# Altium PCB CPU.PcbDoc (part 1 of 2)
Units mm, origin at the board's own origin, x right, y up, seen from the top; angles counter-clockwise.
Board outline 103 x 60 mm, 2 copper layers (Top Layer, Bottom Layer), stack 0.904 mm thick; 128 components, 126 nets, 552 pads, 250 vias.
Unrouted connection lines stored in the file: 10.
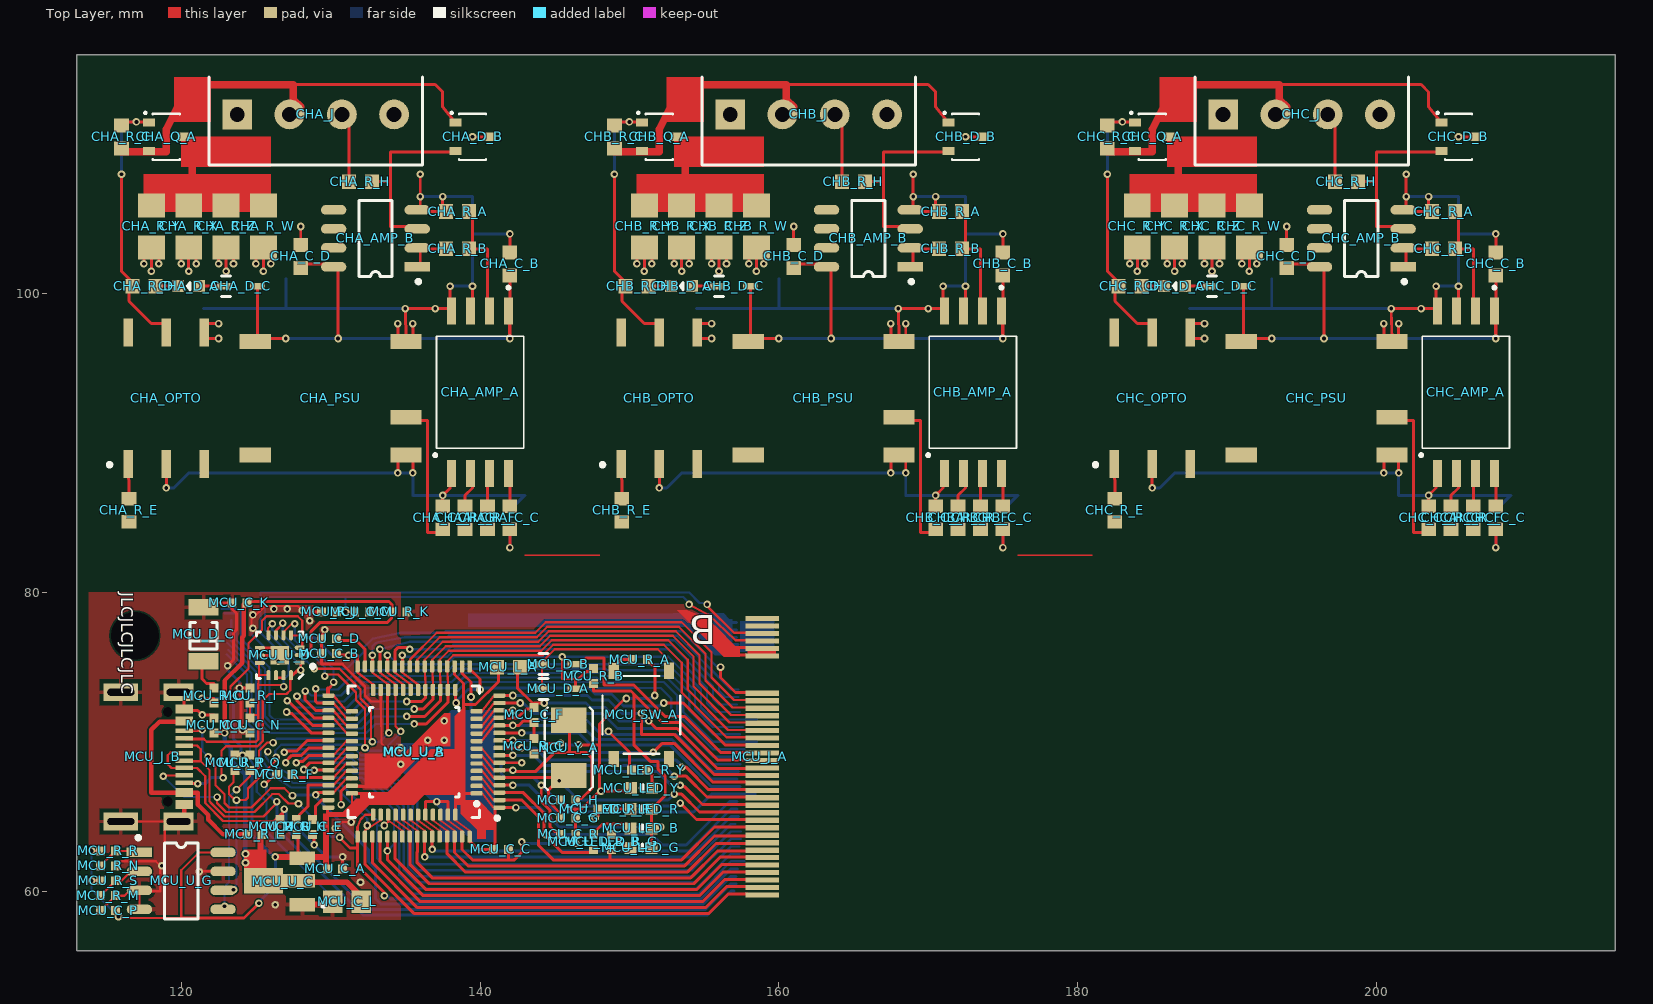
[diagram p0: Top Layer view]
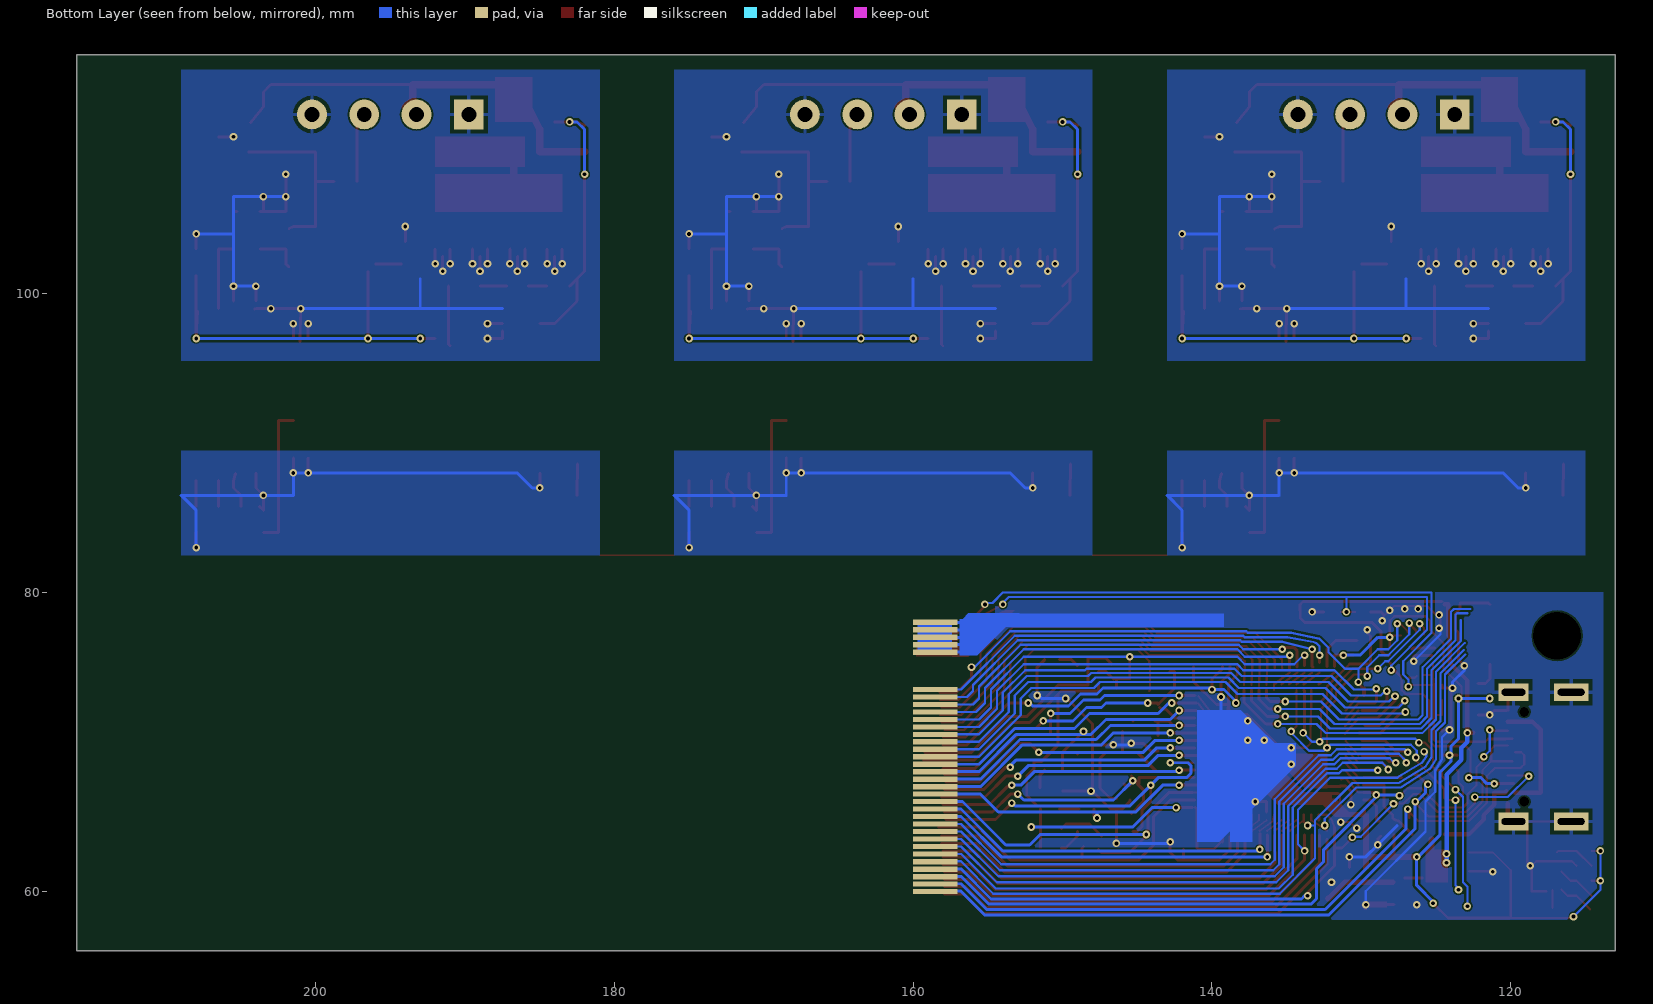
[diagram p1: Bottom Layer view, seen from below]
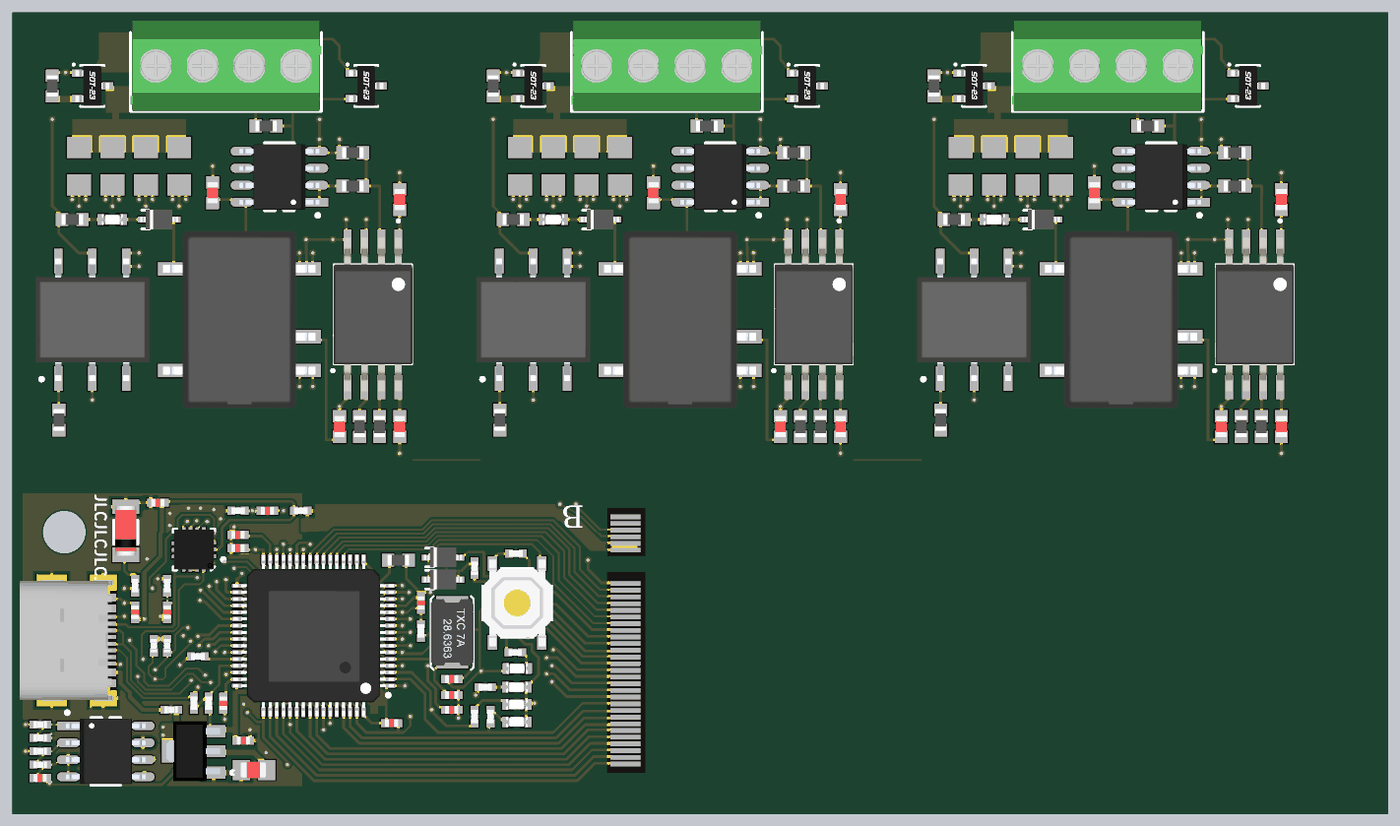
[diagram p3: 3D render of the assembled board from above, using the file's embedded part models]

## Layer stack, top to bottom
Top Solder: solder mask 0.0102, Solder Resist, Dk 3.5
Top Layer: signal copper 0.127
Dielectric 1: core 0.65, FR-4, Dk 4.2
Bottom Layer: signal copper 0.127
Bottom Solder: solder mask 0.0102, Solder Resist, Dk 3.5

## Board outline
113,56 113,80 113,116 216,116 216,56

## Design rules (kind name [scope] priority, off if disabled: settings)
Clearance [All] p1: gap=0.1 ignorepadtopadclearanceinfootprint=FALSE except(0: Arc-Hole Track-Hole SMDPad-Hole THPad-Hole Via-Hole Fill-Hole Poly-Hole Region-Hole Text-Hole; 0.15: Arc-Fill Arc-Poly Arc-Region Track-Fill Track-Poly Track-Region Fill-Fill Fill-Poly Fill-Region Poly-Poly Poly-Region Region-Region)
DiffPairsRouting [All] p1: maxlimit=0.254 minlimit=0.254 mostfreqgap=0.254 toplayer_minwidth=0.381 toplayer_maxwidth=1 toplayer_prefwidth=0.381 bottomlayer_minwidth=0.381 bottomlayer_maxwidth=1 bottomlayer_prefwidth=0.381 maxuncoupledlength=12.7
HoleSize [All] p1: absolutevalues=TRUE maxlimit=4 minlimit=0.025 maxpercent=80.000 minpercent=20.000
MinimumSolderMaskSliver [All] p1: minsoldermaskwidth=0
PolygonConnect [All] p1: thpad.connectstyle=Relief thpad.reliefconductorwidth=0.254 thpad.reliefentries=4 thpad.polygonreliefangle="90 Angle" thpad.airgapwidth=0.254 smdpad.connectstyle=Relief smdpad.reliefconductorwidth=0.254 smdpad.reliefentries=4 smdpad.polygonreliefangle="90 Angle" smdpad.airgapwidth=0.254 via.connectstyle=Direct via.reliefconductorwidth=0.254 via.reliefentries=4 via.polygonreliefangle="90 Angle" via.airgapwidth=0.254
RoutingVias [All] p1: holewidth=0.711 width=1.27 viastyle="Through Hole" minholewidth=0.711 minwidth=1.27 maxholewidth=0.711 maxwidth=1.27
SilkToSolderMaskClearance [IsPad] p1: minsilkscreentomaskgap=0 clearancetoexposedcopper=TRUE
SolderMaskExpansion [All] p1: expansion=0.102
Width [All] p1: maxlimit=1 minlimit=0.15 preferedwidth=0.2 minimp=50.000000 maximp=50.000000 favimp=50.000000
26 further rules are at their usual default settings.

## Classes and differential pairs
component class AFE_C: CHC_AMP_A CHC_AMP_B CHC_C_A CHC_C_B CHC_C_C CHC_C_D CHC_D_A CHC_D_B CHC_D_C CHC_J CHC_OPTO CHC_PSU CHC_Q_A CHC_R_A CHC_R_B CHC_R_C CHC_R_D CHC_R_E CHC_R_F CHC_R_G CHC_R_H CHC_R_W CHC_R_X CHC_R_Y CHC_R_Z
component class AFE_B: CHB_AMP_A CHB_AMP_B CHB_C_A CHB_C_B CHB_C_C CHB_C_D CHB_D_A CHB_D_B CHB_D_C CHB_J CHB_OPTO CHB_PSU CHB_Q_A CHB_R_A CHB_R_B CHB_R_C CHB_R_D CHB_R_E CHB_R_F CHB_R_G CHB_R_H CHB_R_W CHB_R_X CHB_R_Y CHB_R_Z
component class AFE_A: CHA_AMP_A CHA_AMP_B CHA_C_A CHA_C_B CHA_C_C CHA_C_D CHA_D_A CHA_D_B CHA_D_C CHA_J CHA_OPTO CHA_PSU CHA_Q_A CHA_R_A CHA_R_B CHA_R_C CHA_R_D CHA_R_E CHA_R_F CHA_R_G CHA_R_H CHA_R_W CHA_R_X CHA_R_Y CHA_R_Z D3
component class CPU: B C11 CPU_LED_B CPU_LED_B_R CPU_LED_G CPU_LED_G_R CPU_LED_R CPU_LED_R_R CPU_LED_Y CPU_LED_Y_R CPU_R_F D_CPU_A D_CPU_B G MCU_C_A MCU_C_B MCU_C_C MCU_C_D MCU_C_E MCU_C_F MCU_C_G MCU_C_H MCU_C_I MCU_C_K MCU_C_L MCU_C_M MCU_C_N MCU_C_P MCU_C_R MCU_D_A MCU_D_B MCU_D_C MCU_J_A MCU_J_B MCU_L_A MCU_LED_B MCU_LED_G MCU_LED_R MCU_LED_R_B MCU_LED_R_G MCU_LED_R_R MCU_LED_R_Y MCU_LED_Y MCU_R_A MCU_R_B MCU_R_C MCU_R_F MCU_R_G MCU_R_H MCU_R_I MCU_R_J MCU_R_K MCU_R_L MCU_R_M MCU_R_N MCU_R_O MCU_R_P MCU_R_Q MCU_R_R MCU_R_S MCU_SW_A MCU_U_A MCU_U_B MCU_U_C MCU_U_D MCU_U_G MCU_Y_A R R2 R3 R4 U? Ueth_a

## Components (designator, comment, footprint, x,y, rotation, side; value= is the part's Value field where it differs from the comment)
CHA_AMP_A "AMC1200BDWVR" SOIC-8-P1.27-W7.5 140,93.4 r270 top
CHA_AMP_B "LM358" SOIC-8-P1.27-W3.5 133,103.7 r180 top
CHA_C_A "CL10A106MA8NRNC" C_0603 137.5,85 r270 top value=10uF
CHA_C_B "CL10A106MA8NRNC" C_0603 142,102 r90 top value=10uF
CHA_C_C "CL10A106MA8NRNC" C_0603 142,85 r90 top value=10uF
CHA_C_D "CL10A106MA8NRNC" C_0603 128,102.5 r90 top value=10uF
CHA_D_A "KT-0603R" D_0603 120.5,100.5 r0 top
CHA_D_B "PSM712-LF-T7" TO-236AB 139.5,110.5 r0 top
CHA_D_C "1N4148WS" SOD-323 124,100.5 r0 top
CHA_J "XY350V-3.5-4P" XY350V-3.5-4P 129,112 r0 top
CHA_OPTO "4N35SM" SOT254P916X508-6N 119,93 r90 top
CHA_PSU "B0505XT-1WR3" CONV_B0512XT-1WR3 130,93 r180 top
CHA_Q_A "AO3400A" TO-236AB 119,110.5 r0 top
CHA_R_A "0603WAF1001T5E" R_0603 138.5,105.5 r0 top value=1k
CHA_R_B "0603WAF2202T5E" R_0603 138.5,103 r180 top value=22k
CHA_R_C "0603WAF2202T5E" R_0603 116,110.5 r270 top value=22k
CHA_R_D "0603WAF1001T5E" R_0603 117.5,100.5 r0 top value=1k
CHA_R_E "0603WAF1001T5E" R_0603 116.5,85.5 r90 top value=1k
CHA_R_F "0603WAF0000T5E" R_0603 140.5,85 r90 top value=0R
CHA_R_G "0603WAF0000T5E" R_0603 139,85 r90 top value=0R
CHA_R_H "0603WAF0000T5E" R_0603 132,107.5 r180 top value=0R
CHA_R_W "1206W4F1000T5E" R_1206 125.5,104.5 r90 top value=100R
CHA_R_X "1206W4F1000T5E" R_1206 120.5,104.5 r90 top value=100R
CHA_R_Y "1206W4F1000T5E" R_1206 118,104.5 r90 top value=100R
CHA_R_Z "1206W4F1000T5E" R_1206 123,104.5 r90 top value=100R
CHB_AMP_A "AMC1200BDWVR" SOIC-8-P1.27-W7.5 173,93.4 r270 top
CHB_AMP_B "LM358" SOIC-8-P1.27-W3.5 166,103.7 r180 top
CHB_C_A "CL10A106MA8NRNC" C_0603 170.5,85 r270 top value=10uF
CHB_C_B "CL10A106MA8NRNC" C_0603 175,102 r90 top value=10uF
CHB_C_C "CL10A106MA8NRNC" C_0603 175,85 r90 top value=10uF
CHB_C_D "CL10A106MA8NRNC" C_0603 161,102.5 r90 top value=10uF
CHB_D_A "KT-0603R" D_0603 153.5,100.5 r0 top
CHB_D_B "PSM712-LF-T7" TO-236AB 172.5,110.5 r0 top
CHB_D_C "1N4148WS" SOD-323 157,100.5 r0 top
CHB_J "XY350V-3.5-4P" XY350V-3.5-4P 162,112 r0 top
CHB_OPTO "4N35SM" SOT254P916X508-6N 152,93 r90 top
CHB_PSU "B0505XT-1WR3" CONV_B0512XT-1WR3 163,93 r180 top
CHB_Q_A "AO3400A" TO-236AB 152,110.5 r0 top
CHB_R_A "0603WAF1001T5E" R_0603 171.5,105.5 r0 top value=1k
CHB_R_B "0603WAF2202T5E" R_0603 171.5,103 r180 top value=22k
CHB_R_C "0603WAF2202T5E" R_0603 149,110.5 r270 top value=22k
CHB_R_D "0603WAF1001T5E" R_0603 150.5,100.5 r0 top value=1k
CHB_R_E "0603WAF1001T5E" R_0603 149.5,85.5 r90 top value=1k
CHB_R_F "0603WAF0000T5E" R_0603 173.5,85 r90 top value=0R
CHB_R_G "0603WAF0000T5E" R_0603 172,85 r90 top value=0R
CHB_R_H "0603WAF0000T5E" R_0603 165,107.5 r180 top value=0R
CHB_R_W "1206W4F1000T5E" R_1206 158.5,104.5 r90 top value=100R
CHB_R_X "1206W4F1000T5E" R_1206 153.5,104.5 r90 top value=100R
CHB_R_Y "1206W4F1000T5E" R_1206 151,104.5 r90 top value=100R
CHB_R_Z "1206W4F1000T5E" R_1206 156,104.5 r90 top value=100R
CHC_AMP_A "AMC1200BDWVR" SOIC-8-P1.27-W7.5 206,93.4 r270 top
CHC_AMP_B "LM358" SOIC-8-P1.27-W3.5 199,103.7 r180 top
CHC_C_A "CL10A106MA8NRNC" C_0603 203.5,85 r270 top value=10uF
CHC_C_B "CL10A106MA8NRNC" C_0603 208,102 r90 top value=10uF
CHC_C_C "CL10A106MA8NRNC" C_0603 208,85 r90 top value=10uF
CHC_C_D "CL10A106MA8NRNC" C_0603 194,102.5 r90 top value=10uF
CHC_D_A "KT-0603R" D_0603 186.5,100.5 r0 top
CHC_D_B "PSM712-LF-T7" TO-236AB 205.5,110.5 r0 top
CHC_D_C "1N4148WS" SOD-323 190,100.5 r0 top
CHC_J "XY350V-3.5-4P" XY350V-3.5-4P 195,112 r0 top
CHC_OPTO "4N35SM" SOT254P916X508-6N 185,93 r90 top
CHC_PSU "B0505XT-1WR3" CONV_B0512XT-1WR3 196,93 r180 top
CHC_Q_A "AO3400A" TO-236AB 185,110.5 r0 top
CHC_R_A "0603WAF1001T5E" R_0603 204.5,105.5 r0 top value=1k
CHC_R_B "0603WAF2202T5E" R_0603 204.5,103 r180 top value=22k
CHC_R_C "0603WAF2202T5E" R_0603 182,110.5 r270 top value=22k
CHC_R_D "0603WAF1001T5E" R_0603 183.5,100.5 r0 top value=1k
CHC_R_E "0603WAF1001T5E" R_0603 182.5,85.5 r90 top value=1k
CHC_R_F "0603WAF0000T5E" R_0603 206.5,85 r90 top value=0R
CHC_R_G "0603WAF0000T5E" R_0603 205,85 r90 top value=0R
CHC_R_H "0603WAF0000T5E" R_0603 198,107.5 r180 top value=0R
CHC_R_W "1206W4F1000T5E" R_1206 191.5,104.5 r90 top value=100R
CHC_R_X "1206W4F1000T5E" R_1206 186.5,104.5 r90 top value=100R
CHC_R_Y "1206W4F1000T5E" R_1206 184,104.5 r90 top value=100R
CHC_R_Z "1206W4F1000T5E" R_1206 189,104.5 r90 top value=100R
MCU_C_A "CL05A106MQ5NUNC" C_0402 130.3,61.5 r0 top value=10uF
MCU_C_B "CL05A106MQ5NUNC" C_0402 129.9,75.9 r180 top value=10uF
MCU_C_C "CL05A106MQ5NUNC" C_0402 141.4,62.8 r0 top value=10uF
MCU_C_D "CL05A106MQ5NUNC" C_0402 129.9,76.9 r180 top value=10uF
MCU_C_E "CL05A106MQ5NUNC" C_0402 128.8,64.3 r270 top value=10uF
MCU_C_F "CL05A105KA5NQNC" C_0402 143.6,71.8 r90 top value=1uF
MCU_C_G "0402CG120J500NT" C_0402 145.9,64.9 r180 top value=12pF
MCU_C_H "0402CG120J500NT" C_0402 145.9,66.1 r0 top value=12pF
MCU_C_I "CL05A106MQ5NUNC" C_0402 122.2,71.1 r90 top value=10uF
MCU_C_K "CL05A106MQ5NUNC" C_0402 123.9,79.3 r180 top value=10uF
MCU_C_L "CL21A106KAYNNNE" C_0805 131.1,59.3 r0 top value=10uF
MCU_C_M "CL05B104KO5NNNC" C_0402 132.1,78.7 r0 top value=100nF
MCU_C_N "CL05B104KO5NNNC" C_0402 124.6,71.1 r270 top value=100nF
MCU_C_P "CL05A106MQ5NUNC" C_0402 115.1,58.7 r0 top value=10uF
MCU_C_R "0402CG101J500NT" C_0402 145.9,63.8 r180 top value=100pF
MCU_D_A "1N4148WS" SOD-323 145.25,73.55 r0 top
MCU_D_B "1N4148WS" SOD-323 145.25,75.2 r0 top
MCU_D_C "ZMM3V3-M" DO-213AA 121.5,77.2 r90 top
MCU_J_A "NGFF_MALE_B" NGFF_MALE_B 156.275,69 r90 top
MCU_J_B "918-418K2023S40001" 918-418K2023S40001 116.9,69 r270 top
MCU_L_A "SDFL1608S100KTF" L_0603 141.9,75 r180 top value=10uH
MCU_LED_B "19-217/BHC-ZL1M2RY/3T" D_0603 150.77,64.2 r0 top
MCU_LED_G "19-217/GHC-YR1S2/3T" D_0603 150.77,62.9 r0 top
MCU_LED_R "KT-0603R" D_0603 150.77,65.5 r0 top
MCU_LED_R_B "0402WGF2200TCE" R_0402 147.6,63.3 r90 top value=220R
MCU_LED_R_G "0402WGF3300TCE" R_0402 148.8,63.3 r90 top value=330R
MCU_LED_R_R "0402WGF3300TCE" R_0402 148.4,65.5 r0 top value=330R
MCU_LED_R_Y "0402WGF3300TCE" R_0402 150.65,68.1 r0 top value=330R
MCU_LED_Y "19-21UYC/S530-A4/TR8" D_0603 150.8,66.9 r0 top
MCU_R_A "0402WGF3300TCE" R_0402 150.7,75.5 r0 top value=330R
MCU_R_B "0402WGF4701TCE" R_0402 147.6,74.4 r90 top value=4.7k
MCU_R_C "0402WGF0000TCE" R_0402 143.6,69.7 r90 top value=0R
MCU_R_F "0402WGF220JTCE" R_0402 126.9,67.8 r0 top value=22R
MCU_R_G "0402WGF220JTCE" R_0402 126.6,64.3 r270 top value=22R
MCU_R_H "0402WGF1501TCE" R_0402 127.7,64.3 r270 top value=1.5k
MCU_R_I "0402WGF5101TCE" R_0402 124.6,73.1 r90 top value=5.1k
MCU_R_J "0402WGF5101TCE" R_0402 129.9,78.7 r180 top value=5.1k
MCU_R_K "0402WGF0000TCE" R_0402 134.6,78.7 r180 top value=0R
MCU_R_L "0402WGF0000TCE" R_0402 124.9,63.8 r180 top value=0R
MCU_R_M "0402WGF0000TCE" R_0402 115.1,59.7 r0 top value=0R
MCU_R_N "0402WGF0000TCE" R_0402 115.1,61.7 r0 top value=0R
MCU_R_O "0402WGF0000TCE" R_0402 122.2,73.1 r270 top value=0R
MCU_R_P "0402WGF5101TCE" R_0402 123.6,68.6 r90 top value=5.1k
MCU_R_Q "0402WGF5101TCE" R_0402 124.6,68.6 r90 top value=5.1k
MCU_R_R "0402WGF1002TCE" R_0402 115.1,62.7 r180 top value=10k
MCU_R_S "0402WGF1002TCE" R_0402 115.1,60.7 r180 top value=10k
MCU_SW_A "TS-1187A-B-A-B" TS-1187A-C-C-B 150.8,71.8 r90 top
MCU_U_A "STM32F405RGT6" QFP-64-P0.5MM 135.55,69.35 r180 top
MCU_U_B "GD32F103CBT6" QFP-48-P0.5MM 135.6,69.3 r180 top
MCU_U_C "HT7533-1" SOT-223-3 126.3,60.7 r180 top
MCU_U_D "FUSB302BMPX" QFN-14-P0.5MM 126.6,75.8 r180 top
MCU_U_G "24LC256T-I/SN" SOIC-8-P1.27-W3.5 120,60.7 r0 top
MCU_Y_A "X50328MSB2GI" YSX530GA 145.94,69.6 r90 top value=8MHz

## Footprints (in the part's own frame and the unit in brackets; to place one, negate y for a bottom-side part, rotate by r counter-clockwise, add the part's x,y. Pads: shape width x height; smd on the part's side, far side on the other; paste and mask are expansions set on the pad)
918-418K2023S40001 [mm] "USB-C (USB TYPE-C) USB 2.0 Receptacle Connector 24 (16+8 Dummy) Position Surface Mount, Right Angle"
  rect 1.2x2 hole 0.45 slot 1.6 at 90 deg: 0(-4.32,2.917) 0(4.33,2.917)
  rect 1.2x2.3 hole 0.45 slot 1.8 at 90 deg: 0(-4.32,-0.943) 0(4.33,-0.943)
  rect 0.6x1.15 smd: A1_B12(-3.2,3.3) A4_B9(-2.4,3.297) A9_B4(2.4,3.3) A12_B1(3.2,3.3)
  rect 0.3x1.15 smd: A5(-1.25,3.297) A6(-0.25,3.297) A7(0.25,3.3) A8(1.25,3.297) B5(1.75,3.297) B6(0.75,3.297) B7(-0.75,3.297) B8(-1.75,3.297)
  round 0 hole 0.65 unplated: M(-3,2.2) M(3,2.2)
  body extent -4.47,-3.35 4.47,3.55, height 3.18
C_0402 [mm] "Chip Capacitor; Body 1.0 x 0.5 mm (LxW typ)"
  rect 0.6x0.6 smd: 1(-0.508,0) 2(0.508,0)
  body extent -0.5,-0.3 0.5,0.3, height 0.2
C_0603 [mm] "Chip Capacitor; Body 1.6 x 0.8 mm (LxW typ)"
  rect 0.93x0.98 smd: 1(-0.77,0) 2(0.77,0)
  body extent -0.8,-0.4 0.8,0.4, height 0.3
C_0805 [mm] "Chip Capacitor; Body 2.0 x 1.2 mm (LxW typ)"
  rect 1.3x1.5 smd: 1(-0.95,0) 2(0.95,0)
  body extent -1.05,-0.62 0.95,0.62, height 0.78
CONV_B0512XT-1WR3 [mm]
  rect 2.1x1 smd: 1(-5.05,3.81) 2(-5.05,1.27) 4(-5.05,-3.81) 5(5.05,-3.81) 8(5.05,3.81)
  silkscreen extent -7.1,3.71 -6.9,3.91, body extent -5.7,-6.6 5.7,6.6, height 7.25
D_0603 [mm] "Chip Diode; Body 1.6 x 0.8 mm (LxW typ)"
  rect 0.8x0.8 smd: 1(-0.7,0) 2(0.7,0)
  silkscreen extent -0.1,-0.25 0.1,0.25, body extent -0.8,-0.4 0.8,0.4, height 0.35
DO-213AA [mm] "2 Leads"
  rect 1.1x2 smd: 1(-1.8,0) 2(1.8,0)
  silkscreen extent -1,-0.9 0.8,0.9, body extent -1.85,-0.8 1.85,0.8, height 1.61
L_0603 [mm]
  rect 0.93x0.98 smd: 1(-0.77,0) 2(0.77,0)
  body extent -0.82,-0.41 0.83,0.41, height 0.46
NGFF_MALE_B [mm] "NGFF B Key, Male"
  rect 0.35x2.25 smd: 1(9.25,-2.625) 3(8.75,-2.625) 5(8.25,-2.625) 7(7.75,-2.625) 9(7.25,-2.625) 11(6.75,-2.625) 21(4.25,-2.625) 23(3.75,-2.625) 25(3.25,-2.625) 27(2.75,-2.625) 29(2.25,-2.625) 31(1.75,-2.625) 33(1.25,-2.625) 35(0.75,-2.625) 37(0.25,-2.625) 39(-0.25,-2.625) 41(-0.75,-2.625) 43(-1.25,-2.625) 45(-1.75,-2.625) 47(-2.25,-2.625) 49(-2.75,-2.625) 51(-3.25,-2.625) 53(-3.75,-2.625) 55(-4.25,-2.625) 57(-4.75,-2.625) 59(-5.25,-2.625) 61(-5.75,-2.625) 63(-6.25,-2.625) 65(-6.75,-2.625) 67(-7.25,-2.625) 69(-7.75,-2.625) 71(-8.25,-2.625) 73(-8.75,-2.625) 75(-9.25,-2.625)
  rect 0.35x3 smd far side: 2(9,-2.25) 4(8.5,-2.25) 6(8,-2.25) 8(7.5,-2.25) 10(7,-2.25) 20(4.5,-2.25) 22(4,-2.25) 24(3.5,-2.25) 26(3,-2.25) 28(2.5,-2.25) 30(2,-2.25) 32(1.5,-2.25) 34(1,-2.25) 36(0.5,-2.25) 38(0,-2.25) 40(-0.5,-2.25) 42(-1,-2.25) 44(-1.5,-2.25) 46(-2,-2.25) 48(-2.5,-2.25) 50(-3,-2.25) 52(-3.5,-2.25) 54(-4,-2.25) 56(-4.5,-2.25) 58(-5,-2.25) 60(-5.5,-2.25) 62(-6,-2.25) 64(-6.5,-2.25) 66(-7.025,-2.25) 68(-7.525,-2.25) 70(-8.025,-2.25) 72(-8.525,-2.25) 74(-9.025,-2.25)
QFN-14-P0.5MM [mm] "Quad Flat No Lead, Plastic; 14 Terminals; Body 2.5 x 2.5 mm; Pitch 0.5 mm"
  rect 1.25x1.25 smd: 0(0,0)
  rect 0.28x0.28 smd: 1(-1.515,0.496) 2(-1.515,-0.004) 3(-1.515,-0.504) 4(-0.75,-1.515) 5(-0.25,-1.515) 6(0.25,-1.515) 7(0.75,-1.515) 8(1.515,-0.479) 9(1.515,0.021) 10(1.515,0.521) 11(0.75,1.515) 12(0.25,1.515) 13(-0.25,1.515) 14(-0.75,1.515)
  oval 0.66x0.28 smd: 1(-1.325,0.496) 2(-1.325,-0.004) 3(-1.325,-0.504) 8(1.325,-0.479) 9(1.325,0.021) 10(1.325,0.521)
  oval 0.28x0.66 smd: 4(-0.75,-1.325) 5(-0.25,-1.325) 6(0.25,-1.325) 7(0.75,-1.325) 11(0.75,1.325) 12(0.25,1.325) 13(-0.25,1.325) 14(-0.75,1.325)
  silkscreen extent -2.33,-1.55 1.55,1.55, body extent -1.5,-1.5 1.5,1.5, height 0.81
QFP-48-P0.5MM [mm] "QFP; 48 Leads; Body 7 x 7 mm; Pitch 0.5 mm"
  rrect50% 0.8x0.3 smd: 1(-4.175,2.75) 2(-4.175,2.25) 3(-4.175,1.75) 4(-4.175,1.25) 5(-4.175,0.75) 6(-4.175,0.25) 7(-4.175,-0.25) 8(-4.175,-0.75) 9(-4.175,-1.25) 10(-4.175,-1.75) 11(-4.175,-2.25) 12(-4.175,-2.75) 25(4.175,-2.75) 26(4.175,-2.25) 27(4.175,-1.75) 28(4.175,-1.25) 29(4.175,-0.75) 30(4.175,-0.25) 31(4.175,0.25) 32(4.175,0.75) 33(4.175,1.25) 34(4.175,1.75) 35(4.175,2.25) 36(4.175,2.75)
  rrect50% 0.3x0.8 smd: 13(-2.75,-4.175) 14(-2.25,-4.175) 15(-1.75,-4.175) 16(-1.25,-4.175) 17(-0.75,-4.175) 18(-0.25,-4.175) 19(0.25,-4.175) 20(0.75,-4.175) 21(1.25,-4.175) 22(1.75,-4.175) 23(2.25,-4.175) 24(2.75,-4.175) 37(2.75,4.175) 38(2.25,4.175) 39(1.75,4.175) 40(1.25,4.175) 41(0.75,4.175) 42(0.25,4.175) 43(-0.25,4.175) 44(-0.75,4.175) 45(-1.25,4.175) 46(-1.75,4.175) 47(-2.25,4.175) 48(-2.75,4.175)
  silkscreen extent -4.3,-3 3,3.57, body extent -4.5,-4.5 4.5,4.5, height 1.6
QFP-64-P0.5MM [mm] "64-Pin Plastic Quad Flat Pack (TQFP)"
  rrect50% 0.8x0.3 smd: 1(-5.742,3.75) 2(-5.742,3.25) 3(-5.742,2.75) 4(-5.742,2.25) 5(-5.742,1.75) 6(-5.742,1.25) 7(-5.742,0.75) 8(-5.742,0.25) 9(-5.742,-0.25) 10(-5.742,-0.75) 11(-5.742,-1.25) 12(-5.742,-1.75) 13(-5.742,-2.25) 14(-5.742,-2.75) 15(-5.742,-3.25) 16(-5.742,-3.75) 33(5.7,-3.75) 34(5.7,-3.25) 35(5.7,-2.75) 36(5.7,-2.25) 37(5.7,-1.75) 38(5.7,-1.25) 39(5.7,-0.75) 40(5.7,-0.25) 41(5.7,0.25) 42(5.7,0.75) 43(5.7,1.25) 44(5.7,1.75) 45(5.7,2.25) 46(5.7,2.75) 47(5.7,3.25) 48(5.7,3.75)
  rrect50% 0.3x0.8 smd: 17(-3.75,-5.7) 18(-3.25,-5.7) 19(-2.75,-5.7) 20(-2.25,-5.7) 21(-1.75,-5.7) 22(-1.25,-5.7) 23(-0.75,-5.7) 24(-0.25,-5.7) 25(0.25,-5.7) 26(0.75,-5.7) 27(1.25,-5.7) 28(1.75,-5.7) 29(2.25,-5.7) 30(2.75,-5.7) 31(3.25,-5.7) 32(3.75,-5.7) 49(3.75,5.7) 50(3.25,5.7) 51(2.75,5.7) 52(2.25,5.7) 53(1.75,5.7) 54(1.25,5.7) 55(0.75,5.7) 56(0.25,5.7) 57(-0.25,5.7) 58(-0.75,5.7) 59(-1.25,5.7) 60(-1.75,5.7) 61(-2.25,5.7) 62(-2.75,5.7) 63(-3.25,5.7) 64(-3.75,5.7)
  silkscreen extent -5.72,-4.4 4.4,4.57, body extent -6.01,-6.01 6.01,6.01, height 1.55
R_0402 [mm] "Body 1.0 x 0.5 mm (LxW typ)"
  rect 0.6x0.6 smd: 1(-0.508,0) 2(0.508,0)
  body extent -0.5,-0.25 0.5,0.25, height 0.35
R_0603 [mm] "Body 1.6 x 0.8 mm (LxW typ)"
  rect 0.93x0.98 smd: 1(-0.77,0) 2(0.77,0)
  body extent -0.82,-0.41 0.83,0.41, height 0.46
R_1206 [mm] "Body 3.2 x 1.6 mm (LxW typ)"
  rect 1.6x1.8 smd: 1(-1.4,0) 2(1.4,0)
  body extent -1.91,-0.76 1.91,0.76, height 1
SOD-323 [mm] "SOD-323/SC-76; 2 Leads; Body 1.7 x 1.3 mm, (LxW)"
  rect 1x0.45 smd: 1(-1.1,0) 2(1.1,0)
  silkscreen extent -1.3,-0.7 -0.7,0.7, body extent -1.43,-0.74 1.43,0.76, height 1.12
SOIC-8-P1.27-W3.5 [mm]
  rect 1.7x0.65 smd: 1(-2.8,1.9)
  oval 1.7x0.65 smd: 2(-2.8,0.63) 3(-2.8,-0.64) 4(-2.8,-1.91) 5(2.8,-1.91) 6(2.8,-0.64) 7(2.8,0.63) 8(2.8,1.9)
  silkscreen extent -3,-2.55 1.12,3.01, body extent -3,-2.45 3,2.45, height 1.5
SOIC-8-P1.27-W7.5 [mm]
  rect 1.8x0.6 smd mask+0.07: 1(-5.45,1.905) 2(-5.45,0.635) 3(-5.45,-0.635) 4(-5.45,-1.905) 5(5.45,-1.905) 6(5.45,-0.635) 7(5.45,0.635) 8(5.45,1.905)
  silkscreen extent -7.1,-2.93 3.75,2.93, body extent -5.75,-2.95 5.75,2.95, height 2.8
SOT254P916X508-6N [mm]
  rect 1.85x0.65 smd: 1(-4.4,2.54) 2(-4.4,0) 3(-4.4,-2.54) 4(4.4,-2.54) 5(4.4,0) 6(4.4,2.54)
  silkscreen extent -4.55,3.7 -4.35,3.9, body extent -4.58,-4.25 4.58,4.26, height 5.08
SOT-223-3 [mm] "SOT223, 4-Leads, Body IPC High Density"
  rect 1.7x0.9 smd: 1(-1.8,1.6) 3(-1.8,-1.5)
  rect 2.5x0.9 smd: 2(-1.4,0)
  rect 2.6x1.7 smd: 2(0.8,0)
  silkscreen extent -3.33,1.48 -3.08,1.72, body extent -2.25,-2.25 1.75,2.25, height 1.5
TO-236AB [mm] "SOT-23-3 Leads; Body 3.1 x 3 mm, inc. leads (LxW max)"
  rect 0.8x0.55 smd: 1(-1.15,0.95) 2(-1.15,-0.95) 3(1.15,0)
  silkscreen extent -1.45,-1.55 0.9,1.65, body extent -1.28,-1.5 1.27,1.5, height 1
TS-1187A-C-C-B [mm] "Tactile Switch SPST-NO Top Actuated Surface Mount"
  rect 1.1x0.7 smd: 1(-2.95,1.85) 1(2.95,1.85) 2(-2.95,-1.85) 2(2.95,-1.85)
  silkscreen extent -2.6,-2.6 2.6,2.6, body extent -3.25,-2.54 3.25,2.54, height 1.52
XY350V-3.5-4P [mm] "4 Terminal 3.5mm Header"
  rect 2x2 hole 1: 1(-5.25,0)
  round 2 hole 1: 2(-1.75,0) 3(1.75,0) 4(5.25,0)
  silkscreen extent -7.15,-3.4 7.15,2.5, body extent -7.15,-3.4 7.15,3.4, height 8.4
YSX530GA [mm]
  rect 1.7x2.4 smd: 1(-1.85,0) 2(1.85,0)
  silkscreen extent -2.8,-1.6 2.7,1.6, body extent -2.5,-1.6 2.5,1.6, height 1.2

## Part data
CHA_AMP_A CHB_AMP_A CHC_AMP_A: "U - IC - 100KHz ISOLATION AMPLIFIER", JLC Availability=Extended, LCSC Part #=C79905, Speed=100KHz
CHA_AMP_B CHB_AMP_B CHC_AMP_B: library part LMV358IDR, "U - IC - OP AMP (DUAL)", JLC Availability=Extended, LCSC Part #=C63813, Speed=0.4V/us
CHA_C_A CHA_C_B CHA_C_C CHA_C_D CHB_C_A CHB_C_B CHB_C_C CHB_C_D CHC_C_A CHC_C_B CHC_C_C CHC_C_D: "C - CAPACITOR - MLCC - 10uF - 25V - 0603", LCSC Part #=C96446, Availability=Basic, WVDC=25
CHA_D_A CHB_D_A CHC_D_A MCU_LED_R: "D - LED - 0603 - Red", JLC Availability=Basic, LCSC Part #=C2286
CHA_D_B CHB_D_B CHC_D_B: "D - DIODE - TVS x2 - 7.2V", JLC Availability=Basic, LCSC Part #=C32677, If=1A, Vrrm=7
CHA_D_C CHB_D_C CHC_D_C MCU_D_A MCU_D_B: "D - DIODE - FAST TRR - 100V - 150mA - 4ns", JLC Availability=Basic, LCSC Part #=C2128, If=150mA, PIV=100V, Trr=4ns
CHA_J CHB_J CHC_J: "J - JACK - TERMINAL - 4P - RIGHT - MALE", JLC Availability=Extended, LCSC Part #=C557656
CHA_OPTO CHB_OPTO CHC_OPTO: "Q - OPTOCOUPLER - 4170 V - 100% CTR", LCSC Part #=C258228, Manufacturer_Name=onsemi, Package=SOT254P916X508-6N, DeviceSetName=4N35SM, GateName_1=G$1, Height=5.08mm, LibraryName=4N35SM, Manufacturer_Part_Number=4N35SM, Mouser_Price-Stock=https://www.mouser.co.uk/ProductDetail/onsemi-Fairchild/4N35SM?qs=VZOZQ19d7%2FIRbTYJunTCyQ%3D%3D, SymbolName_1=4N35SM
CHA_PSU CHB_PSU CHC_PSU: "T - Isolated Module DC DC Converter 5 -> 5V 200mA - DIP", LCSC Part #=C19188495, Check_prices=https://www.snapeda.com/parts/B0512XT-1WR3/MORNSUN/view-part/?ref=eda, MF=EVISUN, MP=B0505XT-1WR3, SnapEDA_Link=https://www.snapeda.com/parts/B0512XT-1WR3/MORNSUN/view-part/?ref=snap
CHA_Q_A CHB_Q_A CHC_Q_A: "Q - TRANSISTOR - MOSFET (P) - 20V - 3.4A - 0.26 Ohm", JLC Availability=Basic, LCSC Part #=C20917, WVDC=20
CHA_R_A CHA_R_D CHA_R_E CHB_R_A CHB_R_D CHB_R_E CHC_R_A CHC_R_D CHC_R_E: "R - RESISTOR - SMD - 1k - 1% - 0603", JLC Availability=Basic, LCSC Part #=C21190
CHA_R_B CHA_R_C CHB_R_B CHB_R_C CHC_R_B CHC_R_C: "R - RESISTOR - SMD - 22k - 1% - 0603", JLC Availability=Basic, LCSC Part #=C31850
CHA_R_F CHA_R_G CHA_R_H CHB_R_F CHB_R_G CHB_R_H CHC_R_F CHC_R_G CHC_R_H: "R - RESISTOR - SMD - 0R - 1% - 0603", JLC Availability=Basic, LCSC Part #=C21189
CHA_R_W CHA_R_X CHA_R_Y CHA_R_Z CHB_R_W CHB_R_X CHB_R_Y CHB_R_Z CHC_R_W CHC_R_X CHC_R_Y CHC_R_Z: "R - RESISTOR - SMD - 100R - 1% - 1206", JLC Availability=Basic, LCSC Part #=C17901
MCU_C_A MCU_C_B MCU_C_C MCU_C_D MCU_C_E MCU_C_I MCU_C_K MCU_C_P: "C - CAPACITOR - MLCC - 10uF - 6.3V - 0402", JLC Availability=Basic, LCSC Part #=C15525, WVDC=6.3
MCU_C_F: "C - CAPACITOR - MLCC - 1uF - 25V - 0402", JLC Availability=Basic, LCSC Part #=C52923, WVDC=16
MCU_C_G MCU_C_H: "C - CAPACITOR - MLCC - 12pF - 50V - 0402", JLC Availability=Basic, LCSC Part #=C1547, WVDC=50
MCU_C_L: "C - CAPACITOR - MLCC - 10uF - 25V - 0805", LCSC Part #=C15850, Availability=Basic, WVDC=25
MCU_C_M MCU_C_N: "C - CAPACITOR - MLCC - 100nF - 16V - 0402", JLC Availability=Basic, LCSC Part #=C1525, WVDC=16
MCU_C_R: "C - CAPACITOR - MLCC - 100pF - 50V - 0402", JLC Availability=Extended, LCSC Part #=C1546
MCU_D_C: "D - DIODE - ZENER - 3.3V - 500mW", JLC Availability=Basic, LCSC Part #=C8056
MCU_J_A: "J - JACK - NGFF Male Finger, B Key", Manufacturer=Kyocera, Manufacturer P/N=245863050024829
MCU_J_B: "J - JACK - USB - Type C - Recepticle - SMT - 90°", JLC Availability=LCSC, LCSC Part #=C167321
MCU_L_A: "L - INDUCTOR - 10uH - 0603", JLC Availability=Basic, LCSC Part #=C1035
MCU_LED_B: "D - LED - 0603 - Blue", JLC Availability=Basic, LCSC Part #=C72041
MCU_LED_G: "D - LED - 0603 - Green", JLC Availability=Basic, LCSC Part #=C72043
MCU_LED_R_B: "R - RESISTOR - SMD - 220R - 1% - 0402", JLC Availability=Basic, LCSC Part #=C25091
MCU_LED_R_G MCU_LED_R_R MCU_LED_R_Y MCU_R_A: "R - RESISTOR - SMD - 330R - 1% - 0402", JLC Availability=Basic, LCSC Part #=C25104
MCU_LED_Y: "D - LED - 0603 - Yellow (Sodium)", JLC Availability=Extended, LCSC Part #=C409441
MCU_R_B: "R - RESISTOR - SMD - 4.7k - 1% - 0402", JLC Availability=Basic, LCSC Part #=C25900
MCU_R_C MCU_R_K MCU_R_L MCU_R_M MCU_R_N MCU_R_O: "R - RESISTOR - SMD - 0R - 1% - 0402", JLC Availability=Basic, LCSC Part #=C17168
MCU_R_F MCU_R_G: "R - RESISTOR - SMD - 22R - 1% - 0402", JLC Availability=Basic, LCSC Part #=C25092
MCU_R_H: "R - RESISTOR - SMD - 1.5k - 1% - 0402", JLC Availability=Basic, LCSC Part #=C25867
MCU_R_I MCU_R_J MCU_R_P MCU_R_Q: "R - RESISTOR - SMD - 5.1k - 1% - 0402", JLC Availability=Basic, LCSC Part #=C25905
MCU_R_R MCU_R_S: "R - RESISTOR - SMD - 10k - 1% - 0402", JLC Availability=Basic, LCSC Part #=C25744
MCU_SW_A: "SW - SWITCH - SPST - NO - Top Actuated Surface Mount", JLC Availability=Basic, LCSC Part #=C318884
MCU_U_A: "U - IC - MCU 32BIT 1MB FLASH 64LQFP", JLC Availability=Extended, LCSC Part #=C15742, ComponentLink1Description=Upverter, ComponentLink1URL=https://upverter.com/upn/revision/179c87d5c3d4f257/, ComponentLink2Description=Datasheet, ComponentLink2URL=http://www.st.com/content/ccc/resource/technical/document/datasheet/33/d4/6f/1d/df/0b/4c/6d/CD00161566.pdf/files/CD00161566.pdf/jcr:content/translations/en.CD00161566.pdf
MCU_U_B: "U - IC - MCU, 128 KB Flash, 20 KB Internal RAM, 37 I/Os, 48-pin LQFP, -40 to 85 degC", I/Os (High Current)=37, JLC Availability=Extended, LCSC Part #=C77979, Operating Frequency(F) (Processor speed) (MHz)=72, ComponentLink1Description="Manufacturer URL", ComponentLink1URL=http://www.st.com/web/en/home.html, ComponentLink2Description=Datasheet, ComponentLink2URL=http://www.st.com/st-web-ui/static/active/en/resource/technical/document/datasheet/CD00161566.pdf, ComponentLink3Description="Package Specification", ComponentLink3URL=http://www.st.com/st-web-ui/static/active/en/resource/technical/document/datasheet/DM00058181.pdf, FLASH Size (Prog) (kB)=128, Internal RAM Size (kB)=20
MCU_U_C: "U - IC - 3V3 Power Regulator", JLC Availability=Basic, LCSC Part #=C14289, VOut=3.3
MCU_U_D: "U - IC - USB PD PHY", JLC Availability=Extended, LCSC Part #=C442699
MCU_U_G: "U - IC - EEPROM 256k", JLC Availability=Extended, LCSC Part #=C5458, Storage=256k
MCU_Y_A: "Y - RESONATOR - 8MHZ ±10PPM - SMD-5032", LCSC Part #=C115962, Availability=Basic

## Free pads (board coordinates)
  round 0 hole 3.2 unplated: 11(116.9,77.1)

## Via types
v1: diameter 0.508, hole 0.254, Top Layer to Bottom Layer, tented both sides, 250 vias

## Nets (pads, with @x,y where several pads share a name; then routed paths per layer and width w, separated by ;. In a path a pad name is that pad's centre, name@x,y a point inside that pad or via, vN(x,y) a via of type N, cw(c..) or ccw(c..) an arc to the next point about the centre after c; other vN are vias at no path point)
3V3: CHA_AMP_A.8 CHA_C_C.2 CHB_AMP_A.8 CHB_C_C.2 CHC_AMP_A.8 CHC_C_C.2 | length 5.2
  Top Layer w0.2: CHA_C_C.2@142,85.77 CHA_AMP_A.8@142,87.5 ; CHB_C_C.2@175,85.77 CHB_AMP_A.8@175,87.5 ; CHC_C_C.2@208,85.77 CHC_AMP_A.8@208,87.5
5V: CHA_C_A.2 CHA_PSU.2 CHB_C_A.2 CHB_PSU.2 CHC_C_A.2 CHC_PSU.2 | length 28.5
  Top Layer w0.2: CHA_PSU.2@135.5,91.5 136.5,91.5 136.5,84 CHA_C_A.2@137.5,84 ; CHB_PSU.2@168.5,91.5 169.5,91.5 169.5,84 CHB_C_A.2@170.5,84 ; CHC_PSU.2@201.5,91.5 202.5,91.5 202.5,84 CHC_C_A.2@203.5,84
CHA_GND: CHA_AMP_A.3 CHA_AMP_A.4 CHA_AMP_B.4 CHA_C_B.2 CHA_C_D.2 CHA_D_B.3 CHA_J.1 CHA_J.4 CHA_OPTO.4 CHA_PSU.4 CHA_R_A.1 CHA_R_W.1 CHA_R_X.1 CHA_R_Y.1 CHA_R_Z.1 | length 62.5
  Top Layer w0.2: v1(117.5,102) CHA_R_Y.1@117.5,103 ; v1(118,101.5) CHA_R_Y.1@118,102.5 ; v1(118.5,102) CHA_R_Y.1@118.5,103 ; v1(120,102) CHA_R_X.1@120,103 ; v1(120.5,101.5) CHA_R_X.1@120.5,102.5 ; v1(121,102) CHA_R_X.1@121,103 ; CHA_OPTO.4@121.5,97.5 121.5,97 v1(122.5,97) ; CHA_OPTO.4@121.5,98 v1(122.5,98) ; v1(122.5,102) CHA_R_Z.1@122.5,103 ; v1(123,101.5) CHA_R_Z.1@123,102.5 ; v1(123.5,102) CHA_R_Z.1@123.5,103 ; v1(125,102) CHA_R_W.1@125,103 ; v1(125.5,101.5) CHA_R_W.1@125.5,102.5 ; v1(126,102) CHA_R_W.1@126,103 ; CHA_C_D.2@128,103.5 v1(128,104.5) ; CHA_PSU.4@134.5,97 v1(134.5,98) ; CHA_PSU.4@135,97 135.5,97 v1(135.5,98) ; 135,98 v1(135,99) ; CHA_PSU.4@135.05,96.81 v1(135,99) ; v1(136,108) v1(136,106.5) 136,105.5 CHA_R_A.1@137.5,105.5 ; v1(137.5,106.5) CHA_R_A.1@137.5,105.5 ; CHA_R_A.1@137.73,105.5 CHA_R_A.1@137.5,105.5 ; CHA_AMP_A.4@138,99.5 v1(138,100.5) ; CHA_AMP_A.4@138.11,98.988 138,99 v1(137,99) v1(135,99) ; CHA_AMP_A.3@139.5,99.5 v1(139.5,100.5) ; v1(139.5,110.5) CHA_D_B.3@140.5,110.5 ; CHA_C_B.2@142,103 v1(142,104)
  Bottom Layer w0.2: 121.5,99 127,99 ; 127,101 127,99 ; v1(135,99) 127,99 ; v1(136,106.5) v1(137.5,106.5) 139.5,106.5 139.5,104 ; v1(138,100.5) v1(139.5,100.5) 139.5,103 139.5,104 ; v1(142,104) 139.5,104
CHA_V_BUFF: CHA_AMP_B.1 CHA_AMP_B.2 CHA_R_B.2 | length 3
  Top Layer w0.2: CHA_AMP_B.1@135.8,101.8 136,102 136,103 CHA_R_B.2@137.73,103
CHA_V_DIV: CHA_AMP_A.2 CHA_R_A.2 CHA_R_B.1 | length 7.7
  Top Layer w0.2: CHA_R_A.2@139.27,105.5 139.5,105.5 139.5,104.022 139.5,103 140.518,103 CHA_AMP_A.2@140.5,99
CHA_VB: CHA_R_E.1
CHA_VCC: CHA_AMP_A.1 CHA_AMP_B.8 CHA_C_B.1 CHA_C_D.1 CHA_D_C.2 CHA_PSU.5 | length 32.4
  Top Layer w0.2: CHA_PSU.5@125,96.5 125.1,96.6 CHA_D_C.2@125.1,100.5 ; CHA_PSU.5@126,97 v1(127,97) ; CHA_C_D.1@128.27,102 128.5,102 CHA_AMP_B.8@130,102 ; v1(130.5,97) CHA_AMP_B.8@130.5,101.5 ; CHA_AMP_A.1@141.905,98.85 v1(142,97) CHA_C_B.1@142,101.23
  Bottom Layer w0.2: v1(127,97) v1(130.5,97) v1(142,97)
CHA_VIN: CHA_AMP_B.3 CHA_D_B.2 CHA_R_H.1 | length 12.6
  Top Layer w0.2: CHA_R_H.1@132.77,107.5 134,107.5 ; CHA_AMP_B.3@135.8,104.34 135.5,104.5 134,104.5 134,107.5 ; CHA_D_B.2@138.5,109.5 134,109.5 134,107.5
CHA_VIN_B: CHA_D_B.1 CHA_J.2 CHA_Q_A.2 CHA_R_C.2 | length 29.5
  Top Layer w0.2: 127.5,114 137,114 137.5,113.5 137.5,112.5 CHA_D_B.1@138.35,111.45
  Top Layer w0.5: CHA_R_C.2@116,109.5 119,109.5 119,111 120,113 120,114 127.5,114 127.5,113 CHA_J.2@128,112.5
CHA_VIN_R: CHA_J.3 CHA_R_H.2 | length 4.1
  Top Layer w0.2: CHA_J.3@131,111.5 131.23,111.27 CHA_R_H.2@131.23,107.5
CHA_VM: CHA_AMP_A.7 CHA_R_F.2 | length 1.7
  Top Layer w0.2: CHA_R_F.2@140.5,85.77 CHA_AMP_A.7@140.5,87.5
CHA_VS: CHA_OPTO.5 CHA_Q_A.1 CHA_R_C.1 CHA_R_D.1 | length 18.8
  Top Layer w0.2: v1(116,108) 116,101.5 116.5,101 ; CHA_R_C.1@116,111.27 116.5,111.5 v1(117,111.5) CHA_Q_A.1@118,111.5 ; CHA_R_D.1@117,100.5 116.5,101 ; CHA_OPTO.5@119,98 118,98 116.5,99.5 116.5,100.5 116.5,101
  Bottom Layer w0.2: v1(116,108) 116,111 116.5,111.5 v1(117,111.5)
CHB_GND: CHB_AMP_A.3 CHB_AMP_A.4 CHB_AMP_B.4 CHB_C_B.2 CHB_C_D.2 CHB_D_B.3 CHB_J.1 CHB_J.4 CHB_OPTO.4 CHB_PSU.4 CHB_R_A.1 CHB_R_W.1 CHB_R_X.1 CHB_R_Y.1 CHB_R_Z.1 | length 62.5
  Top Layer w0.2: v1(150.5,102) CHB_R_Y.1@150.5,103 ; v1(151,101.5) CHB_R_Y.1@151,102.5 ; v1(151.5,102) CHB_R_Y.1@151.5,103 ; v1(153,102) CHB_R_X.1@153,103 ; v1(153.5,101.5) CHB_R_X.1@153.5,102.5 ; v1(154,102) CHB_R_X.1@154,103 ; CHB_OPTO.4@154.5,97.5 154.5,97 v1(155.5,97) ; CHB_OPTO.4@154.5,98 v1(155.5,98) ; v1(155.5,102) CHB_R_Z.1@155.5,103 ; v1(156,101.5) CHB_R_Z.1@156,102.5 ; v1(156.5,102) CHB_R_Z.1@156.5,103 ; v1(158,102) CHB_R_W.1@158,103 ; v1(158.5,101.5) CHB_R_W.1@158.5,102.5 ; v1(159,102) CHB_R_W.1@159,103 ; CHB_C_D.2@161,103.5 v1(161,104.5) ; CHB_PSU.4@167.5,97 v1(167.5,98) ; CHB_PSU.4@168,97 168.5,97 v1(168.5,98) ; 168,98 v1(168,99) ; CHB_PSU.4@168.05,96.81 v1(168,99) ; v1(169,108) v1(169,106.5) 169,105.5 CHB_R_A.1@170.5,105.5 ; v1(170.5,106.5) CHB_R_A.1@170.5,105.5 ; CHB_R_A.1@170.73,105.5 CHB_R_A.1@170.5,105.5 ; CHB_AMP_A.4@171,99.5 v1(171,100.5) ; CHB_AMP_A.4@171.11,98.988 171,99 v1(170,99) v1(168,99) ; CHB_AMP_A.3@172.5,99.5 v1(172.5,100.5) ; v1(172.5,110.5) CHB_D_B.3@173.5,110.5 ; CHB_C_B.2@175,103 v1(175,104)
  Bottom Layer w0.2: 154.5,99 160,99 ; 160,101 160,99 ; v1(168,99) 160,99 ; v1(169,106.5) v1(170.5,106.5) 172.5,106.5 172.5,104 ; v1(171,100.5) v1(172.5,100.5) 172.5,103 172.5,104 ; v1(175,104) 172.5,104
CHB_V_BUFF: CHB_AMP_B.1 CHB_AMP_B.2 CHB_R_B.2 | length 3
  Top Layer w0.2: CHB_AMP_B.1@168.8,101.8 169,102 169,103 CHB_R_B.2@170.73,103
CHB_V_DIV: CHB_AMP_A.2 CHB_R_A.2 CHB_R_B.1 | length 7.7
  Top Layer w0.2: CHB_R_A.2@172.27,105.5 172.5,105.5 172.5,104.022 172.5,103 173.518,103 CHB_AMP_A.2@173.5,99
CHB_VB: CHB_R_E.1
CHB_VCC: CHB_AMP_A.1 CHB_AMP_B.8 CHB_C_B.1 CHB_C_D.1 CHB_D_C.2 CHB_PSU.5 | length 32.4
  Top Layer w0.2: CHB_PSU.5@158,96.5 158.1,96.6 CHB_D_C.2@158.1,100.5 ; CHB_PSU.5@159,97 v1(160,97) ; CHB_C_D.1@161.27,102 161.5,102 CHB_AMP_B.8@163,102 ; v1(163.5,97) CHB_AMP_B.8@163.5,101.5 ; CHB_AMP_A.1@174.905,98.85 v1(175,97) CHB_C_B.1@175,101.23
  Bottom Layer w0.2: v1(160,97) v1(163.5,97) v1(175,97)
CHB_VIN: CHB_AMP_B.3 CHB_D_B.2 CHB_R_H.1 | length 12.6
  Top Layer w0.2: CHB_R_H.1@165.77,107.5 167,107.5 ; CHB_AMP_B.3@168.8,104.34 168.5,104.5 167,104.5 167,107.5 ; CHB_D_B.2@171.5,109.5 167,109.5 167,107.5
CHB_VIN_B: CHB_D_B.1 CHB_J.2 CHB_Q_A.2 CHB_R_C.2 | length 29.5
  Top Layer w0.2: 160.5,114 170,114 170.5,113.5 170.5,112.5 CHB_D_B.1@171.35,111.45
  Top Layer w0.5: CHB_R_C.2@149,109.5 152,109.5 152,111 153,113 153,114 160.5,114 160.5,113 CHB_J.2@161,112.5
CHB_VIN_R: CHB_J.3 CHB_R_H.2 | length 4.1
  Top Layer w0.2: CHB_J.3@164,111.5 164.23,111.27 CHB_R_H.2@164.23,107.5
CHB_VM: CHB_AMP_A.7 CHB_R_F.2 | length 1.7
  Top Layer w0.2: CHB_R_F.2@173.5,85.77 CHB_AMP_A.7@173.5,87.5
CHB_VS: CHB_OPTO.5 CHB_Q_A.1 CHB_R_C.1 CHB_R_D.1 | length 18.8
  Top Layer w0.2: v1(149,108) 149,101.5 149.5,101 ; CHB_R_C.1@149,111.27 149.5,111.5 v1(150,111.5) CHB_Q_A.1@151,111.5 ; CHB_R_D.1@150,100.5 149.5,101 ; CHB_OPTO.5@152,98 151,98 149.5,99.5 149.5,100.5 149.5,101
  Bottom Layer w0.2: v1(149,108) 149,111 149.5,111.5 v1(150,111.5)
CHC_GND: CHC_AMP_A.3 CHC_AMP_A.4 CHC_AMP_B.4 CHC_C_B.2 CHC_C_D.2 CHC_D_B.3 CHC_J.1 CHC_J.4 CHC_OPTO.4 CHC_PSU.4 CHC_R_A.1 CHC_R_W.1 CHC_R_X.1 CHC_R_Y.1 CHC_R_Z.1 | length 62.5
  Top Layer w0.2: v1(183.5,102) CHC_R_Y.1@183.5,103 ; v1(184,101.5) CHC_R_Y.1@184,102.5 ; v1(184.5,102) CHC_R_Y.1@184.5,103 ; v1(186,102) CHC_R_X.1@186,103 ; v1(186.5,101.5) CHC_R_X.1@186.5,102.5 ; v1(187,102) CHC_R_X.1@187,103 ; CHC_OPTO.4@187.5,97.5 187.5,97 v1(188.5,97) ; CHC_OPTO.4@187.5,98 v1(188.5,98) ; v1(188.5,102) CHC_R_Z.1@188.5,103 ; v1(189,101.5) CHC_R_Z.1@189,102.5 ; v1(189.5,102) CHC_R_Z.1@189.5,103 ; v1(191,102) CHC_R_W.1@191,103 ; v1(191.5,101.5) CHC_R_W.1@191.5,102.5 ; v1(192,102) CHC_R_W.1@192,103 ; CHC_C_D.2@194,103.5 v1(194,104.5) ; CHC_PSU.4@200.5,97 v1(200.5,98) ; CHC_PSU.4@201,97 201.5,97 v1(201.5,98) ; 201,98 v1(201,99) ; CHC_PSU.4@201.05,96.81 v1(201,99) ; v1(202,108) v1(202,106.5) 202,105.5 CHC_R_A.1@203.5,105.5 ; v1(203.5,106.5) CHC_R_A.1@203.5,105.5 ; CHC_R_A.1@203.73,105.5 CHC_R_A.1@203.5,105.5 ; CHC_AMP_A.4@204,99.5 v1(204,100.5) ; CHC_AMP_A.4@204.11,98.988 204,99 v1(203,99) v1(201,99) ; CHC_AMP_A.3@205.5,99.5 v1(205.5,100.5) ; v1(205.5,110.5) CHC_D_B.3@206.5,110.5 ; CHC_C_B.2@208,103 v1(208,104)
  Bottom Layer w0.2: 187.5,99 193,99 ; 193,101 193,99 ; v1(201,99) 193,99 ; v1(202,106.5) v1(203.5,106.5) 205.5,106.5 205.5,104 ; v1(204,100.5) v1(205.5,100.5) 205.5,103 205.5,104 ; v1(208,104) 205.5,104
CHC_V_BUFF: CHC_AMP_B.1 CHC_AMP_B.2 CHC_R_B.2 | length 3
  Top Layer w0.2: CHC_AMP_B.1@201.8,101.8 202,102 202,103 CHC_R_B.2@203.73,103
CHC_V_DIV: CHC_AMP_A.2 CHC_R_A.2 CHC_R_B.1 | length 7.7
  Top Layer w0.2: CHC_R_A.2@205.27,105.5 205.5,105.5 205.5,104.022 205.5,103 206.518,103 CHC_AMP_A.2@206.5,99
CHC_VB: CHC_R_E.1
CHC_VCC: CHC_AMP_A.1 CHC_AMP_B.8 CHC_C_B.1 CHC_C_D.1 CHC_D_C.2 CHC_PSU.5 | length 32.4
  Top Layer w0.2: CHC_PSU.5@191,96.5 191.1,96.6 CHC_D_C.2@191.1,100.5 ; CHC_PSU.5@192,97 v1(193,97) ; CHC_C_D.1@194.27,102 194.5,102 CHC_AMP_B.8@196,102 ; v1(196.5,97) CHC_AMP_B.8@196.5,101.5 ; CHC_AMP_A.1@207.905,98.85 v1(208,97) CHC_C_B.1@208,101.23
  Bottom Layer w0.2: v1(193,97) v1(196.5,97) v1(208,97)
CHC_VIN: CHC_AMP_B.3 CHC_D_B.2 CHC_R_H.1 | length 12.6
  Top Layer w0.2: CHC_R_H.1@198.77,107.5 200,107.5 ; CHC_AMP_B.3@201.8,104.34 201.5,104.5 200,104.5 200,107.5 ; CHC_D_B.2@204.5,109.5 200,109.5 200,107.5
CHC_VIN_B: CHC_D_B.1 CHC_J.2 CHC_Q_A.2 CHC_R_C.2 | length 29.5
  Top Layer w0.2: 193.5,114 203,114 203.5,113.5 203.5,112.5 CHC_D_B.1@204.35,111.45
  Top Layer w0.5: CHC_R_C.2@182,109.5 185,109.5 185,111 186,113 186,114 193.5,114 193.5,113 CHC_J.2@194,112.5
CHC_VIN_R: CHC_J.3 CHC_R_H.2 | length 4.1
  Top Layer w0.2: CHC_J.3@197,111.5 197.23,111.27 CHC_R_H.2@197.23,107.5
CHC_VM: CHC_AMP_A.7 CHC_R_F.2 | length 1.7
  Top Layer w0.2: CHC_R_F.2@206.5,85.77 CHC_AMP_A.7@206.5,87.5
CHC_VS: CHC_OPTO.5 CHC_Q_A.1 CHC_R_C.1 CHC_R_D.1 | length 18.8
  Top Layer w0.2: v1(182,108) 182,101.5 182.5,101 ; CHC_R_C.1@182,111.27 182.5,111.5 v1(183,111.5) CHC_Q_A.1@184,111.5 ; CHC_R_D.1@183,100.5 182.5,101 ; CHC_OPTO.5@185,98 184,98 182.5,99.5 182.5,100.5 182.5,101
  Bottom Layer w0.2: v1(182,108) 182,111 182.5,111.5 v1(183,111.5)
CPU_5_V_SW: MCU_J_A.9 MCU_J_A.11 MCU_R_K.1 | length 3
  Top Layer w0.2: 156.797,75.8 MCU_J_A.11@158.3,75.8 ; 156.797,76.3 MCU_J_A.9@158.3,76.3
GND: CHA_AMP_A.5 CHA_C_A.1 CHA_C_C.1 CHA_OPTO.2 CHA_PSU.1 CHB_AMP_A.5 CHB_C_A.1 CHB_C_C.1 CHB_OPTO.2 CHB_PSU.1 CHC_AMP_A.5 CHC_C_A.1 CHC_C_C.1 CHC_OPTO.2 CHC_PSU.1 | length 110.8
  Top Layer w0.2: v1(119,87) CHA_OPTO.2@119,88 ; v1(134.5,88) CHA_PSU.1@134.5,89 ; v1(135.5,88) CHA_PSU.1@135.5,89 ; CHA_C_A.1@137.77,85.77 137.5,85.5 CHA_C_A.1@137.5,85.77 v1(137.5,86.5) 138,87 CHA_AMP_A.5@138,88 ; v1(142,83) CHA_C_C.1@142,84 ; v1(152,87) CHB_OPTO.2@152,88 ; v1(167.5,88) CHB_PSU.1@167.5,89 ; v1(168.5,88) CHB_PSU.1@168.5,89 ; CHB_C_A.1@170.77,85.77 170.5,85.5 CHB_C_A.1@170.5,85.77 v1(170.5,86.5) 171,87 CHB_AMP_A.5@171,88 ; v1(175,83) CHB_C_C.1@175,84 ; v1(185,87) CHC_OPTO.2@185,88 ; v1(200.5,88) CHC_PSU.1@200.5,89 ; v1(201.5,88) CHC_PSU.1@201.5,89 ; CHC_C_A.1@203.77,85.77 203.5,85.5 CHC_C_A.1@203.5,85.77 v1(203.5,86.5) 204,87 CHC_AMP_A.5@204,88 ; v1(208,83) CHC_C_C.1@208,84
  Bottom Layer w0.2: v1(119,87) 119.5,87 120.5,88 v1(135.5,88) 135.5,86.5 v1(137.5,86.5) 143,86.5 142,85.5 v1(142,83) ; v1(152,87) 152.5,87 153.5,88 v1(168.5,88) 168.5,86.5 v1(170.5,86.5) 176,86.5 175,85.5 v1(175,83) ; v1(185,87) 185.5,87 186.5,88 v1(201.5,88) 201.5,86.5 v1(203.5,86.5) 209,86.5 208,85.5 v1(208,83)
MCU_3V3: MCU_C_A.1 MCU_C_B.1 MCU_C_C.1 MCU_C_P.2 MCU_J_A.39 MCU_L_A.2 MCU_LED_B.2 MCU_LED_G.2 MCU_LED_R.2 MCU_R_B.1 MCU_R_H.2 MCU_R_O.2 MCU_R_P.2 MCU_R_Q.2 MCU_R_R.2 MCU_R_S.2 MCU_U_A.1 MCU_U_A.19 MCU_U_A.32 MCU_U_A.48 MCU_U_A.64 MCU_U_B.1 MCU_U_B.24 MCU_U_B.36 MCU_U_B.48 MCU_U_C.3 MCU_U_D.3 MCU_U_D.4 MCU_U_G.8 | length 137.8
  Top Layer w0.15: v1(114,60.7) MCU_R_S.2@114.592,60.7 ; v1(114,62.7) MCU_R_R.2@114.592,62.7 ; v1(115.8,58.3) 115.9,58.2 120,58.2 ; 120.1,58.2 120,58.2 ; MCU_U_G.8@122.8,62.6 121.2,62.6 120,61.4 120,58.2 ; v1(123.5,72.9) 123.3,73.1 123.3,73.7 124.5,74.9 124.5,76.6 125.4,77.5 125.4,78.1 125.7,78.4 126.3,78.4 127.8,78.4 128.1,78.1 v1@128.1,77.1 ; MCU_U_D.4@127.35,77.125 128.075,77.125 v1@128.1,77.1 ; MCU_U_D.3@128.1,76.3 v1(128.1,77) v1@128.1,77.1 ; 131.425,65.825 MCU_U_B.36@131.425,66.55 ; MCU_U_A.32@131.8,74.65 MCU_U_B.24@132.85,73.85 ; MCU_U_B.48@138.35,64.75 MCU_U_A.64@139.3,64.05 ; MCU_U_B.1@140.1,66.55 MCU_U_B.1@140.149,66.544 ; MCU_U_B.1@140.15,66.55 MCU_U_A.1@140.9,65.6
  Top Layer w0.2: 120.1,58.2 124.2,58.2 v1(125.2,59.2) ; v1@121.4,72.8 121.492,72.892 122.2,72.892 ; MCU_R_P.2@123.6,69.1 123.608,69.108 MCU_R_Q.2@124.6,69.108 ; v1(126.3,62.3) 127.2,62.3 ; MCU_U_C.3@127.3,62.2 127.2,62.3 ; MCU_U_C.3@127.8,62.4 MCU_R_H.2@127.8,63.792 ; 129.7,62.3 127.2,62.3 ; MCU_C_A.1@129.792,61.5 129.8,61.5 MCU_U_A.48@129.8,65.55 ; MCU_C_B.1@130.5,75.8 v1(131.2,75.8) 131.8,75.8 MCU_U_A.32@131.8,75.05 ; MCU_U_B.36@131.55,66.55 138.4,66.55 ; MCU_U_A.19@138.3,75.05 138.3,74.95 138.3,74.5 138.9,73.9 138.9,72.5 ; MCU_U_B.48@138.35,65.125 138.35,66.5 ; 138.4,66.5 138.4,66.55 ; 138.8,71.9 138.8,72.1 ; MCU_U_A.64@139.3,63.3 MCU_U_A.64@139.3,63.4 ; MCU_U_A.64@139.3,63.75 MCU_U_A.64@139.3,63.65 MCU_U_A.64@139.3,63.4 ; MCU_U_B.1@139.775,66.55 138.4,66.55 ; MCU_C_C.1@140.9,62.8 MCU_C_C.1@140.892,62.8 139.9,62.8 MCU_U_A.64@139.3,63.4 ; MCU_C_C.1@141,62.9 MCU_U_A.1@141,65.5 ; MCU_U_A.1@141.119,65.6 MCU_U_A.1@141.15,65.6 ; MCU_L_A.2@141.23,75 141.23,74.03 139.7,72.5 138.9,72.5 ; MCU_U_A.1@141.292,65.6 v1(142.4,65.6) ; MCU_R_B.1@147.6,73.9 MCU_R_B.1@147.6,73.892 147.6,73.4 150.1,73.4 150.4,73.1 ; MCU_LED_R.2@151.47,65.5 MCU_LED_B.2@151.47,64.2 151.47,62.98 MCU_LED_G.2@151.5,62.95 ; MCU_LED_B.2@151.6,64.3 v1(152.1,64.3) ; MCU_LED_R.2@151.7,65.7 152.4,66.4 152.4,67.7 151.9,68.2 151.9,68.7 151.4,68.7 150.3,69.8 150.3,73.1 150.4,73.1 ; MCU_J_A.39@159.3,68.8 155.9,68.8 153.4,71.3 152.2,71.3 150.4,73.1 ; 138.4,66.55 138.4,71.7 138.8,72.1 ; 138.8,72.1 138.9,72.2 138.9,72.5
  Bottom Layer w0.15: v1(114,60.7) 114,60.1 v1(115.8,58.3) ; v1@114,60.8 v1(114,62.7)
  Bottom Layer w0.2: v1(121.4,72.9) v1(123.5,72.9) 123.5,70.2 124,69.7 124,68.7 124.75,67.95 124.75,63.75 126.2,62.3 v1(126.3,62.3) ; v1(125.2,59.2) 125.1,59.2 126.3,60.4 v1@126.3,62.1 ; v1(128.1,77) 128.9,77 130.1,75.8 v1(131.2,75.8) ; v1(142.4,65.6) 144,65.6 145.3,64.3 v1(152.1,64.3)
  other v1: 124.1,69.1
MCU_5V: MCU_C_I.1 MCU_C_K.1 MCU_C_L.2 MCU_R_K.2 MCU_R_L.1 MCU_U_C.2 MCU_U_D.2 | length 45.5
  Top Layer w0.2: MCU_C_K.1@124.608,79.4 133.9,79.4 134.1,79.2 MCU_R_K.2@134.1,78.8 ; MCU_U_C.2@125.9,60.9 MCU_U_C.2@127.1,60.9 ; MCU_U_D.2@128.115,75.804 128.404,75.804 128.7,76.1 128.7,77.4 129.3,78 133.8,78 134.092,78.292 MCU_R_K.2@134.092,78.7
  Top Layer w0.3: 122.5,70.6 v1(122.9,70.6) 122.9,74.1 124.1,75.3 124.1,77 124.2,77.1 124.2,79.2 MCU_C_K.1@124.408,79.2
  Top Layer w0.4: MCU_U_C.2@125.3,61.2 125.308,61.208 MCU_R_L.1@125.308,63.5 ; MCU_U_C.2@127.9,60.6 131.1,60.6 132.2,59.5 MCU_C_L.2@132.25,59.5
  Bottom Layer w0.3: v1(122.9,70.6) 122.9,70 123.3,69.6 123.3,68.8 124.3,67.8 v1(124.3,61.9)
  other v1: 124.3,62.5
MCU_A0: MCU_R_N.1 MCU_R_R.1 MCU_U_G.1 | length 2.8
  Top Layer w0.15: MCU_R_N.1@114.6,61.7 115.6,62.7 MCU_R_R.1@115.608,62.7 116.8,62.7 MCU_U_G.1@116.9,62.6
MCU_A1: MCU_R_M.1 MCU_R_S.1 MCU_U_G.2 | length 2.7
  Top Layer w0.15: MCU_R_M.1@114.6,59.7 115.6,60.7 MCU_R_S.1@115.608,60.7 116,60.7 MCU_U_G.2@116.6,61.3
MCU_BUTTON_OC: MCU_D_B.2 MCU_J_A.37 | length 16.3
  Top Layer w0.2: MCU_D_B.2@146.7,75.2 147.1,75.6 148.3,75.6 148.3,73.8 150.3,73.8 152.4,71.7 153.7,71.7 156.1,69.3 MCU_J_A.37@159.2,69.3